# Altium PCB PCB1.PcbDoc
Units mm, origin at the board's own origin, x right, y up, seen from the top; angles counter-clockwise.
Board outline 36.25 x 45 mm, 2 copper layers (Top Layer, Bottom Layer); 7 components, 6 nets, 16 pads, 0 vias.
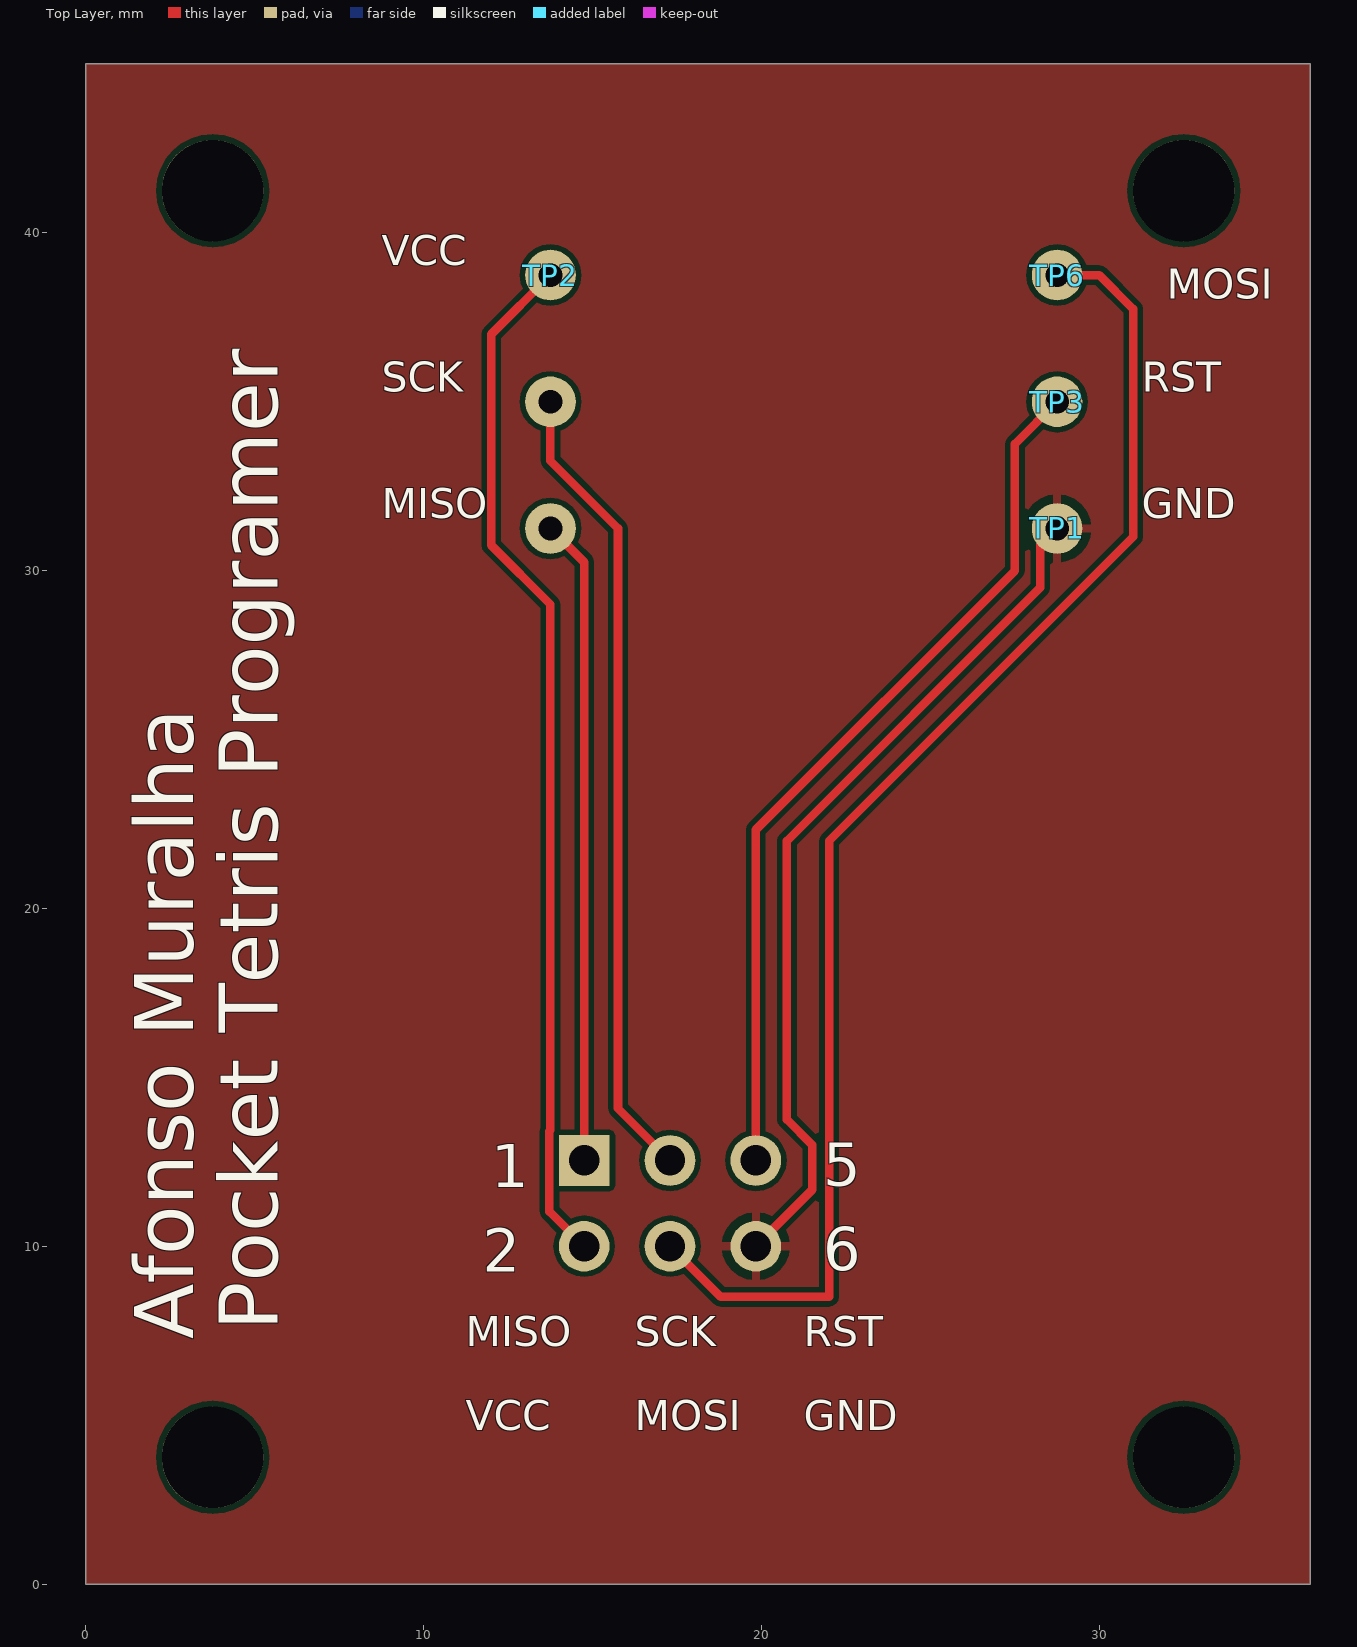
[diagram p0: Top Layer view]
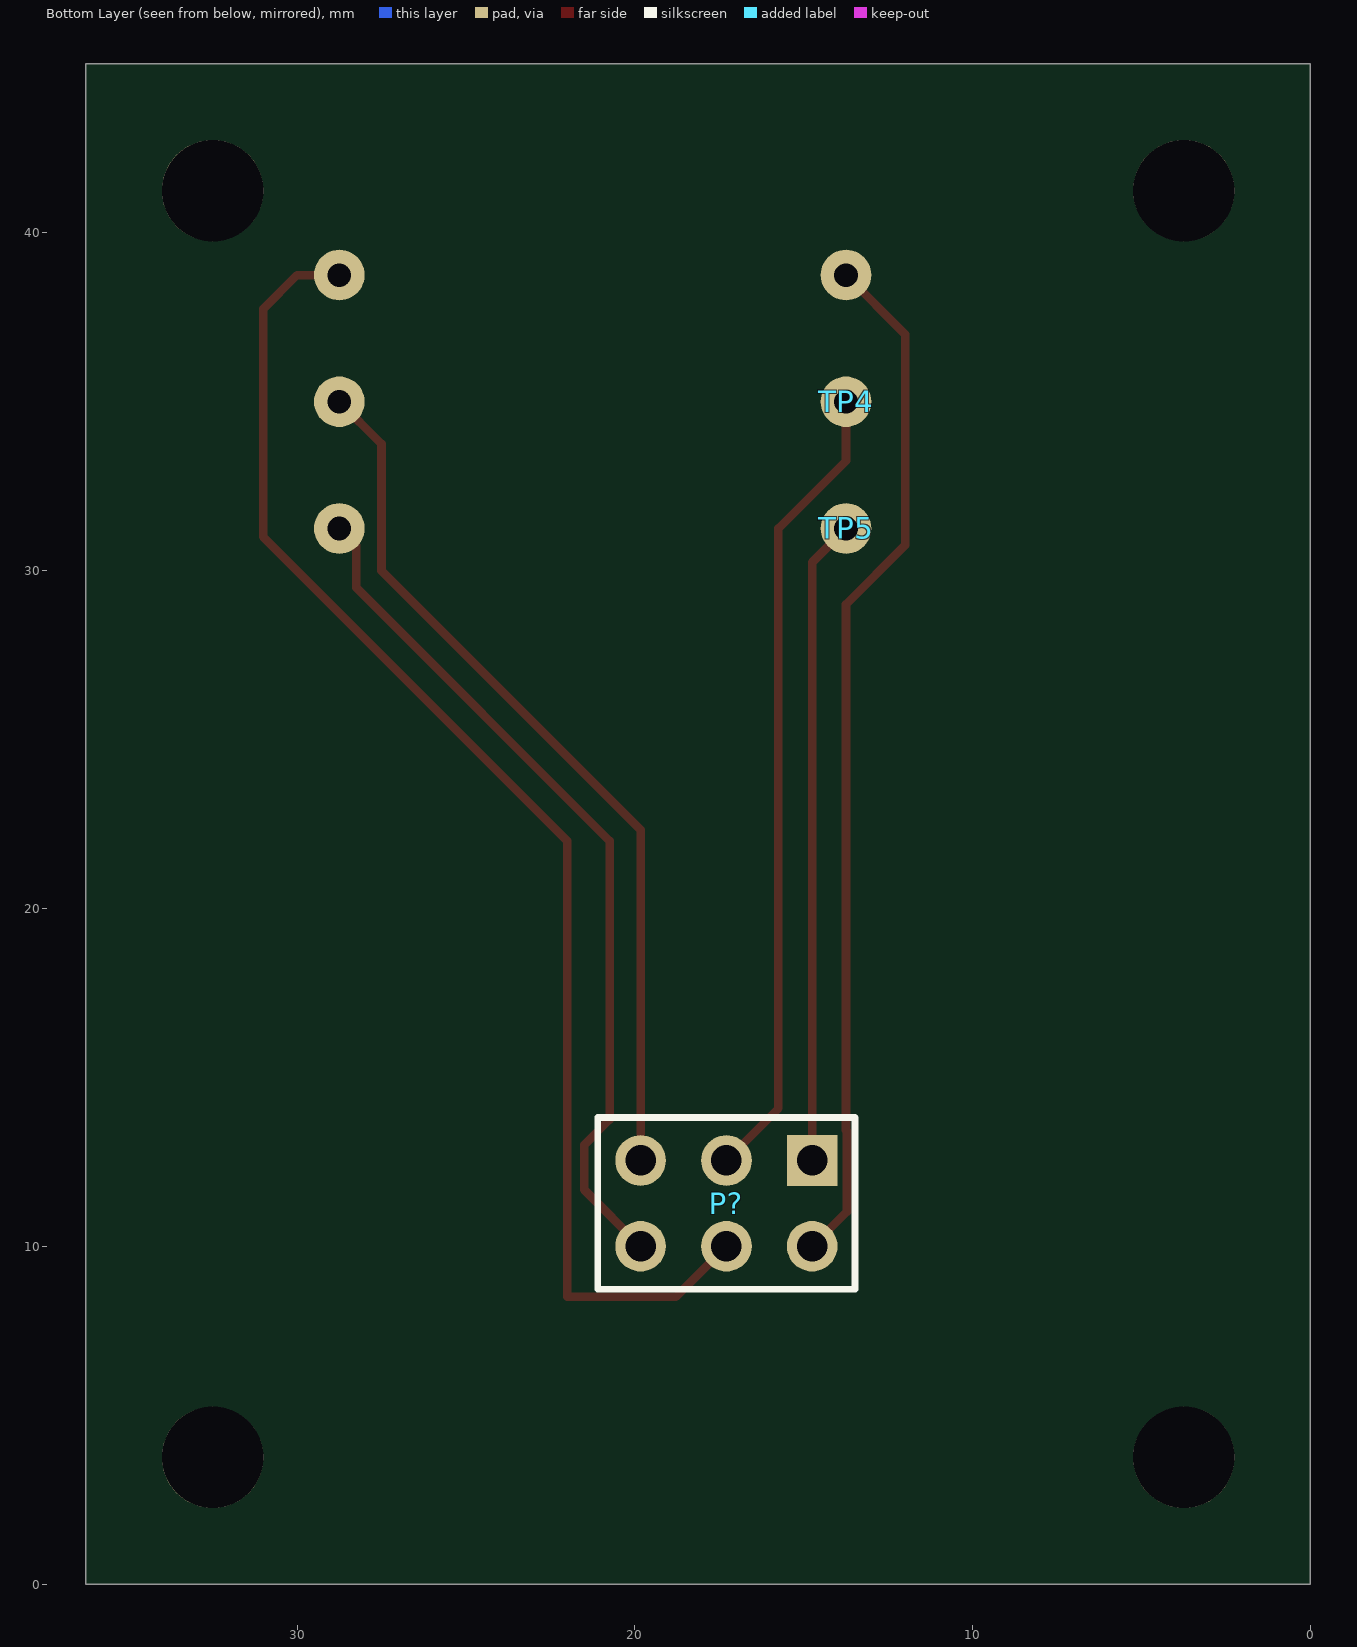
[diagram p1: Bottom Layer view, seen from below]

## Layer stack, top to bottom
Top Solder: solder mask 0.0102, Solder Resist, Dk 3.5
Top Layer: signal copper 0.0356
Dielectric 1: dielectric 0.32, FR-4, Dk 4.8
Bottom Layer: signal copper 0.0356
Bottom Solder: solder mask 0.0102, Solder Resist, Dk 3.5

## Board outline
0,0 0,45 36.25,45 36.25,0

## Design rules (kind name [scope] priority, off if disabled: settings)
Clearance Clearance_1 [All] p1: gap=0.152 ignorepadtopadclearanceinfootprint=TRUE
Clearance [All] p2: gap=0.152 ignorepadtopadclearanceinfootprint=TRUE
ComponentClearance ComponentClearance_1 [InComponent('BT1')] p1: gap=-0.25 collisioncheckmode=3 verticalgap=2540 showdistances=FALSE
ComponentClearance [InComponent('D1')] p2: gap=-0.025 collisioncheckmode=3 verticalgap=2540 showdistances=TRUE
PolygonConnect [All] p1: connectstyle=Relief reliefconductorwidth=0.254 reliefentries=4 polygonreliefangle="90 Angle" airgapwidth=0.254
RoutingVias [All] p1: holewidth=0.3 width=0.5 viastyle="Through Hole" minholewidth=0.3 minwidth=0.5 maxholewidth=0.3 maxwidth=0.5
SolderMaskExpansion [All] p1: expansion=0.102
Width [All] p1: maxlimit=0.254 minlimit=0.254 preferedwidth=0.254
29 further rules are at their usual default settings.

## Components (designator, comment, footprint, x,y, rotation, side; value= is the part's Value field where it differs from the comment)
P? "Header 3X2" HDR2X3 14.75,12.54 r0 bottom
TP1 "Test pad" TP15R 28.75,31.25 r0 top
TP2 "Test pad" TP15R 13.75,38.75 r90 top
TP3 "Test pad" TP15R 28.75,35 r90 top
TP4 "Test pad" TP15R 13.75,35 r90 bottom
TP5 "Test pad" TP15R 13.75,31.25 r90 bottom
TP6 "Test pad" TP15R 28.75,38.75 r90 top

## Footprints (in the part's own frame and the unit in brackets; to place one, negate y for a bottom-side part, rotate by r counter-clockwise, add the part's x,y. Pads: shape width x height; smd on the part's side, far side on the other; paste and mask are expansions set on the pad)
HDR2X3 [mm] "Connector; Header; 3x2 Position"
  rect 1.5x1.5 hole 0.9: 1(0,0)
  round 1.5 hole 0.9: 2(0,2.54) 3(2.54,0) 4(2.54,2.54) 5(5.08,0) 6(5.08,2.54)
  silkscreen extent -1.27,-1.27 6.35,3.81
TP15R [mm]
  round 1.5 hole 0.7: TP(0,0)

## Part data
P?: "Header, 3-Pin, Dual row", LatestRevisionDate=17-Jul-2002, LatestRevisionNote="Re-released for DXP Platform.", Publisher="Altium Limited"
TP1 TP2 TP3 TP4 TP5 TP6: library part TPTP15R

## Free pads (board coordinates)
  round 3 hole 3: 1(3.75,41.25) 2(32.5,41.25) 3(32.5,3.75) 4(3.75,3.75)

## Nets (pads, with @x,y where several pads share a name; then routed paths per layer and width w, separated by ;. In a path a pad name is that pad's centre, name@x,y a point inside that pad or via, vN(x,y) a via of type N, cw(c..) or ccw(c..) an arc to the next point about the centre after c; other vN are vias at no path point)
GND: P?.6 TP1.TP | length 25.6
  Top Layer w0.254: P?.6 21.5,11.67 21.5,13 20.75,13.75 20.75,22 28.25,29.5 28.25,30.75 TP1.TP
MISO: P?.1 TP5.TP | length 19.1
  Top Layer w0.254: TP5.TP 14.75,30.25 P?.1
MOSI: P?.4 TP6.TP | length 41
  Top Layer w0.254: P?.4 18.79,8.5 22,8.5 22,22 31,31 31,37.75 30,38.75 TP6.TP
RST: P?.5 TP3.TP | length 26.2
  Top Layer w0.254: P?.5 19.83,22.33 27.5,30 27.5,33.75 TP3.TP
SCK: P?.3 TP4.TP | length 23.9
  Top Layer w0.254: TP4.TP 13.75,33.25 15.75,31.25 15.75,14.08 P?.3
VCC: P?.2 TP2.TP | length 30.6
  Top Layer w0.254: TP2.TP 12,37 12,30.75 13.75,29 13.75,13.435 13.721,13.406 13.721,11.029 P?.2

## Polygon pours and split planes (outlines as drawn)
GND on Top Layer "top" (solid, pour order 0): 0,0 36.25,0 36.25,45 0,45

## Silkscreen, mask and mechanical layers (free items; w line width, h text height)
Top Overlay:
  text "VCC" at 8.75,38.75 h1.52
  text "MOSI" at 32,37.75 h1.52
  text "SCK" at 8.75,35 h1.52
  text "RST" at 31.25,35 h1.52
  text "MISO" at 8.75,31.25 h1.52
  text "GND" at 31.25,31.25 h1.52
  text "Pocket Tetris Programer" at 6.25,7.5 h3 r90
  text "Afonso Muralha" at 3.75,7.25 h3 r90
  text "MISO" at 11.25,6.75 h1.52
  text "SCK" at 16.25,6.75 h1.52
  text "RST" at 21.25,6.75 h1.52
  text "VCC" at 11.25,4.25 h1.52
  text "MOSI" at 16.25,4.25 h1.52
  text "GND" at 21.25,4.25 h1.52
Mechanical 2:
  pour cut-out: 3.385,45
  lines w0.127: 0,3.75 0,41.25 ; 3.75,0 32.5,0 ; 3.75,45 32.5,45 ; 36.25,3.75 36.25,41.25
  text "size in mm" at 0,51 h2
  text "PCB Edge" at 0,0 h0.5

## Dimensions
0,45.25 to 36.25,46.25 on Mechanical 2
0,45 to 0,0 on Mechanical 2

## Text inside footprints (layer, text, board x,y; h text height)
P?: Top Overlay "6" at 21.83,9.29 h1.27; Top Overlay "5" at 21.83,11.79 h1.27; Top Overlay "1" at 12,11.75 h1.27; Top Overlay "2" at 11.75,9.25 h1.27